# Altium PCB ARM_DIL_Platine.PcbDoc
Units mm, origin at the board's own origin, x right, y up, seen from the top; angles counter-clockwise.
Board outline 99.06 x 33.53 mm, 2 copper layers (Top Layer, Bottom Layer); 45 components, 67 nets, 219 pads, 28 vias.
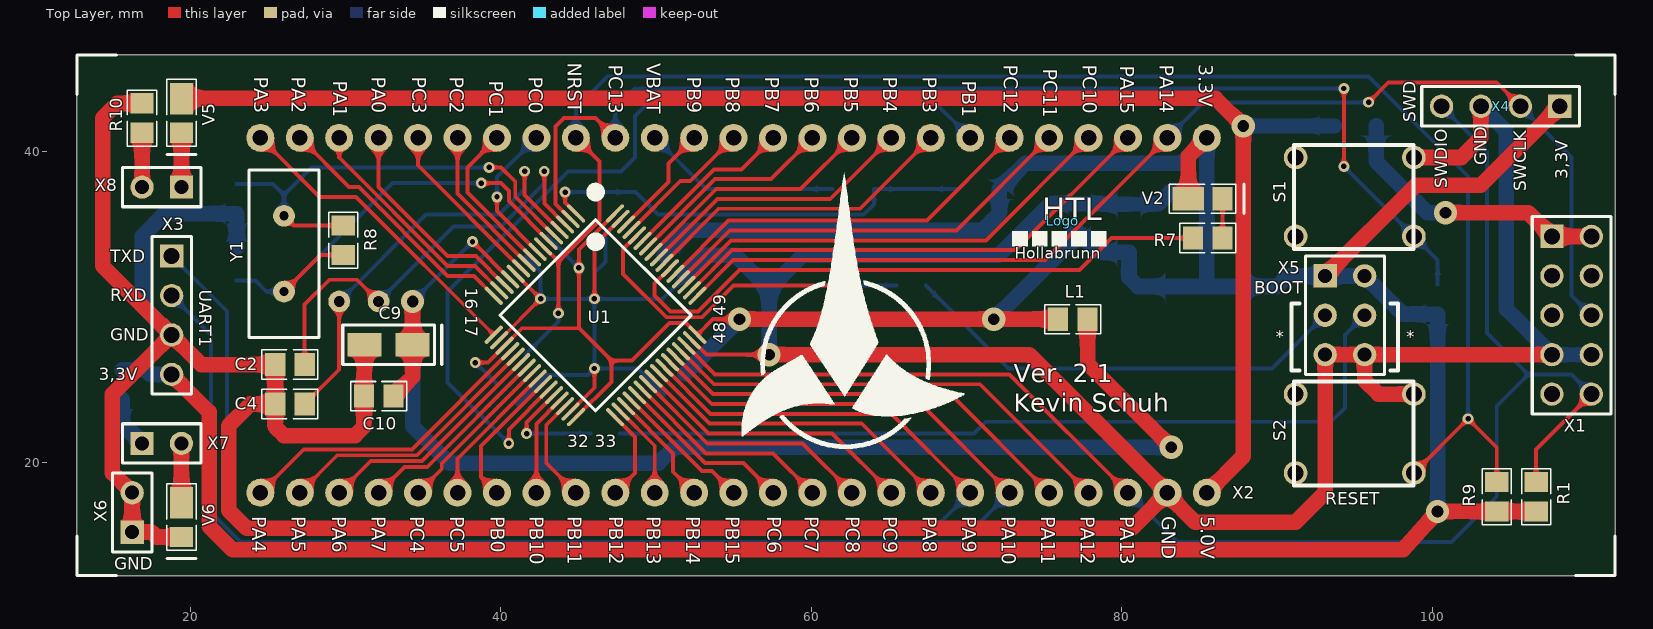
[diagram p0: Top Layer view]
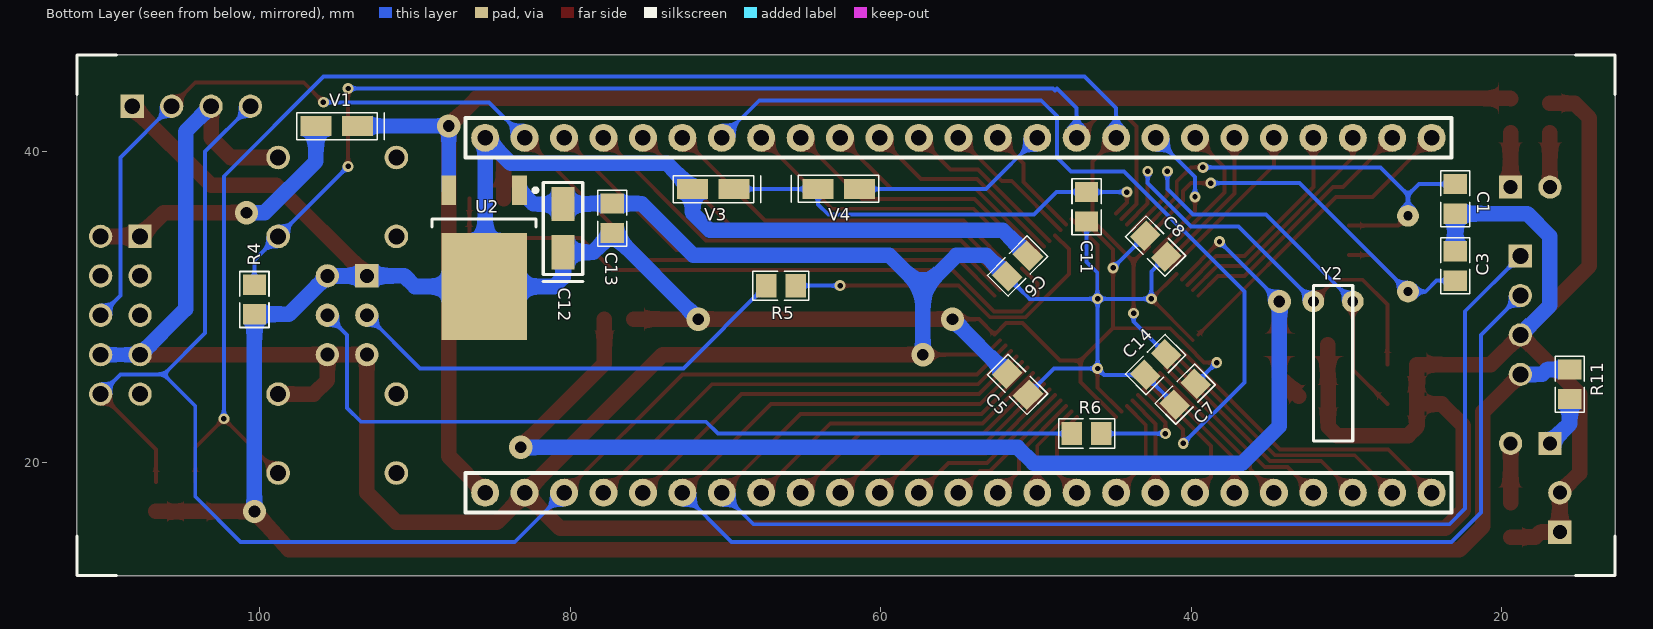
[diagram p1: Bottom Layer view, seen from below]

## Layer stack, top to bottom
Top Solder: solder mask 0.0102, Solder Resist, Dk 3.5
Top Layer: signal copper 0.0356
Dielectric 1: dielectric 0.32, FR-4, Dk 4.8
Bottom Layer: signal copper 0.0356
Bottom Solder: solder mask 0.0102, Solder Resist, Dk 3.5

## Board outline
12.7,46.228 111.76,46.228 111.76,12.7 12.7,12.7

## Design rules (kind name [scope] priority, off if disabled: settings)
Clearance [All] p1: gap=0.125
DiffPairsRouting [All] p1: maxlimit=10 minlimit=0.125 mostfreqgap=0.15 toplayer_minwidth=0.381 toplayer_maxwidth=0.381 toplayer_prefwidth=0.381 bottomlayer_minwidth=0.381 bottomlayer_maxwidth=0.381 bottomlayer_prefwidth=0.381 maxuncoupledlength=12.7
FabricationTestPointUsage FabricationTestPointUsage_1 [All] p1: valid=0 allowmultiple=FALSE
FabricationTestpoint FabricationTestpoint_1 [All] p1: side=3 testpointundercomponent=TRUE minsize=1.016 maxsize=2.54 preferedsize=1.524 minholesize=0 maxholesize=1.016 preferedholesize=0.813 testpointgrid=0.025 allowsidetop=TRUE allowsidebottom=TRUE usegrid=TRUE gridtolerance=0
HoleSize [All] p1: absolutevalues=TRUE maxlimit=6 minlimit=0.2 maxpercent=80.000 minpercent=20.000
HoleSize FabricationTestpoint [All] p2 off: absolutevalues=TRUE maxlimit=2.54 minlimit=0.025 maxpercent=80.000 minpercent=20.000
HoleSize FabricationTestPointUsage [All] p3 off: absolutevalues=TRUE maxlimit=2.54 minlimit=0.025 maxpercent=80.000 minpercent=20.000
MinimumSolderMaskSliver [All] p1: minsoldermaskwidth=0.249
PlaneClearance [All] p1: clearance=0.5
PlaneConnect [All] p1: planeconnectstyle=Relief reliefexpansion=0.4 reliefentries=4 reliefconductorwidth=0.15 reliefairgap=0.15
PolygonConnect [All] p1: connectstyle=Relief reliefconductorwidth=0.15 reliefentries=4 polygonreliefangle="90 Angle" airgapwidth=0.254
RoutingCorners [All] p1: cornerstyle=45-Degree minsetback=1.25 maxsetback=1.25
RoutingVias [All] p1: holewidth=0.3 width=0.6 viastyle="Through Hole" minholewidth=0.2 minwidth=0.45 maxholewidth=0.45 maxwidth=0.75
SilkToSilkClearance [All] p1: silktosilkclearance=0.16
SilkToSolderMaskClearance [IsPad] p1: minsilkscreentomaskgap=0 clearancetoexposedcopper=TRUE
SolderMaskExpansion [All] p1: expansion=0.075
UnpouredPolygon [All] p1: allowunpoured=FALSE
Width GND [InNet('GND')] p1: maxlimit=1.5 minlimit=0.254 preferedwidth=1
Width VCC [(InNet('+3.3V') AND InNet('+5V'))] p2: maxlimit=1.5 minlimit=0.254 preferedwidth=1
Width [All] p3: maxlimit=10 minlimit=0.254 preferedwidth=0.254
19 further rules are at their usual default settings.

## Components (designator, comment, footprint, x,y, rotation, side; value= is the part's Value field where it differs from the comment)
C1 "Cap" 0805_CAP 22.987,36.957 r90 bottom
C2 "Cap" 0805_CAP 26.416,26.289 r0 top
C3 "Cap" 0805_CAP 22.987,32.639 r90 bottom
C4 "Cap" 0805_CAP 26.416,23.749 r180 top
C5 "Cap" 0805_CAP 51.181,25.019 r45 bottom
C6 "Cap" 0805_CAP 51.181,32.639 r135 bottom
C7 "Cap" 0805_CAP 40.386,24.384 r135 bottom
C8 "Cap" 0805_CAP 42.291,33.909 r45 bottom
C9 "Cap Pol" 1411_Cap_Pol 32.766,27.559 r180 top
C10 "Cap" 0805_CAP 32.131,24.257 r0 top
C11 "Cap" 0805_CAP 46.736,36.449 r90 bottom
C12 "Cap Pol" 1411_Cap_Pol 80.457,35.07 r90 bottom
C13 "Cap" 0805_CAP 77.282,35.705 r270 bottom
C14 "Cap" 0805_CAP 42.291,26.289 r135 bottom
L1 "ferrite bead" 0805_ferrit 76.835,29.21 r180 top
Logo "HTL Hollabrunn" HTL_Logo 76.2,35.56 r0 top
R1 "Res" 0805_Res 106.68,17.78 r270 top
R4 "Res" 0805_Res 100.33,30.48 r270 bottom
R5 "Res" 0805_Res 66.421,31.369 r180 bottom
R6 "Res" 0805_Res 46.736,21.844 r0 bottom
R7 "Res" 0805_Res 85.537,34.435 r180 top
R8 "Res" 0805_Res 29.845,34.29 r90 top
R9 "Res" 0805_Res 104.14,17.78 r270 top
R10 "Res" 0805_Res 16.891,42.164 r270 top
R11 "Res" 0805_Res 15.621,25.019 r270 bottom
S1 "SW_SPST" Printtaster 91.186,39.624 r270 top locked
S2 "SW_SPST" Printtaster 91.186,24.384 r270 top locked
U1 "STM32F107RBT6" STM32F103RBT6 46.101,29.464 r315 top locked
U2 "LMS8117ADT_3.3" TD03B_N_Low_Dropout_Regulator 85.537,33.165 r270 bottom locked
V1 "D Schottky" BAT254_Schottky 94.488,40.894 r180 bottom
V2 "LED" 0805_LED 85.537,36.975 r0 top locked
V3 "D Schottky" BAT254_Schottky 70.231,36.83 r180 bottom
V4 "D Schottky" BAT254_Schottky 63.246,38.354 r0 bottom
V5 "LED" 0805_LED 19.431,42.164 r270 top
V6 "LED" 0805_LED 19.431,16.129 r270 top
X1 "ST-Link" HDR2X5_STLink 107.696,34.544 r270 top
X2 "DIL Adapter" DIL_Adapter_V03 24.511,40.894 r0 top locked
X3 "UART_1" HDR1X4_UART 18.796,33.274 r270 top
X4 "SWD" HDR1X4_SWD 108.204,42.926 r180 top
X5 "Header 3x2" HDR2X3 93.091,32.004 r270 top locked
X6 "GND" HDR1X2 16.256,15.494 r90 top
X7 "" HDR1X2 16.891,21.209 r0 top
X8 "" HDR1X2 19.431,37.719 r180 top
Y1 "25MHz" Schwingquarz_8MHz_TOP 26.035,30.988 r90 top
Y2 "32kHz" Schwingquarz_32k 29.591,30.353 r0 bottom

## Footprints (in the part's own frame and the unit in brackets; to place one, negate y for a bottom-side part, rotate by r counter-clockwise, add the part's x,y. Pads: shape width x height; smd on the part's side, far side on the other; paste and mask are expansions set on the pad)
0805_CAP [mm]
  rect 1.3x1.5 smd: 1(-0.95,0) 2(0.95,0)
  silkscreen extent -1.8,-0.94 1.8,0.94
0805_ferrit [mm]
  rect 1.3x1.5 smd: 1(-0.95,0) 2(0.95,0)
  silkscreen extent -1.8,-0.94 1.8,0.94
0805_LED [mm]
  rect 2.035x1.5 smd: 1(-1.255,0)
  rect 1.3x1.5 smd: 2(0.95,0)
  silkscreen extent -2.49,-0.94 2.34,0.94
0805_Res [mm]
  rect 1.3x1.5 smd: 1(-0.95,0) 2(0.95,0)
  silkscreen extent -1.8,-0.94 1.8,0.94
1411_Cap_Pol [mm]
  rect 2.2x1.5 smd: 1(-1.55,0) 2(1.55,0)
  silkscreen extent -3.43,-1.27 2.95,1.27
BAT254_Schottky [mm]
  rect 2x1.3 smd: 1(-1.88,0.762) 2(0.787,0.762)
  silkscreen extent -3.12,-0.13 2.51,1.63
DIL_Adapter_V03 [mm] "DIL_Adapter"
  round 1.8 hole 1: 1(0,-22.86) 2(2.54,-22.86) 3(5.08,-22.86) 4(7.62,-22.86) 5(10.16,-22.86) 6(12.7,-22.86) 7(15.24,-22.86) 8(17.78,-22.86) 9(20.32,-22.86) 10(22.86,-22.86) 11(25.4,-22.86) 12(27.94,-22.86) 13(30.48,-22.86) 14(33.02,-22.86) 15(35.56,-22.86) 16(38.1,-22.86) 17(40.64,-22.86) 18(43.18,-22.86) 19(45.72,-22.86) 20(48.26,-22.86) 21(50.8,-22.86) 22(53.34,-22.86) 23(55.88,-22.86) 24(58.42,-22.86) 25(60.96,-22.86) 26(60.96,0) 27(58.42,0) 28(55.88,0) 29(53.34,0) 30(50.8,0) 31(48.26,0) 32(45.72,0) 33(43.18,0) 34(40.64,0) 35(38.1,0) 36(35.56,0) 37(33.02,0) 38(30.48,0) 39(27.94,0) 40(25.4,0) 41(22.86,0) 42(20.32,0) 43(17.78,0) 44(15.24,0) 45(12.7,0) 46(10.16,0) 47(7.62,0) 48(5.08,0) 49(2.54,0) 50(0,0)
HDR1X2 [mm]
  rect 1.5x1.5 hole 0.9: 1(0,0)
  round 1.5 hole 0.9: 2(2.54,0)
  silkscreen extent -1.27,-1.27 3.81,1.27
HDR1X4_SWD [mm]
  rect 1.5x1.5 hole 1.016: 1(0,0)
  round 1.5 hole 1.016: 2(2.54,0) 3(5.08,0) 4(7.62,0)
  silkscreen extent -1.27,-1.27 8.89,1.27
HDR1X4_UART [mm]
  rect 1.5x1.5 hole 1.016: 1(0,0)
  round 1.5 hole 1.016: 2(2.54,0) 3(5.08,0) 4(7.62,0)
  silkscreen extent -1.27,-1.27 8.89,1.27
HDR2X3 [mm] "Connector; Header; 3x2 Position"
  rect 1.5x1.5 hole 0.9: 1(0,0)
  round 1.5 hole 0.9: 2(2.54,0) 3(5.08,0) 4(0,2.54) 5(2.54,2.54) 6(5.08,2.54)
  silkscreen extent -1.27,-1.27 6.35,3.81
HDR2X5_STLink [mm]
  rect 1.5x1.5 hole 1.016: 1(0,0)
  round 1.5 hole 1.016: 2(0,2.54) 3(2.54,0) 4(2.54,2.54) 5(5.08,0) 6(5.08,2.54) 7(7.62,0) 8(7.62,2.54) 9(10.16,0) 10(10.16,2.54)
  silkscreen extent -1.27,-1.27 11.43,3.81
HTL_Logo [mm]
  silkscreen extent -3.28,-1.68 2.82,-0.66
Printtaster [mil]
  round 60 hole 40: 1(0,300) 2(200,300) 3(0,0) 4(200,0)
  silkscreen extent -32,-4 232,299
Schwingquarz_8MHz_TOP [mm]
  round 1.4 hole 0.6: 1(0,0) 2(4.88,0)
  silkscreen extent -2.95,-2.25 7.82,2.25
Schwingquarz_32k [mm]
  round 1.4 hole 0.7: 1(0,0) 2(2.54,0)
  silkscreen extent 0,-1.02 2.54,9
STM32F103RBT6 [mm] "Processor"
  oval 1.55x0.25 smd mask+0: 1(-5.525,3.75) 2(-5.525,3.25) 3(-5.525,2.75) 4(-5.525,2.25) 5(-5.525,1.75) 6(-5.525,1.25) 7(-5.525,0.75) 8(-5.525,0.25) 9(-5.525,-0.25) 10(-5.525,-0.75) 11(-5.525,-1.25) 12(-5.525,-1.75) 13(-5.525,-2.25) 14(-5.525,-2.75) 15(-5.525,-3.25) 16(-5.525,-3.75) 33(5.525,-3.75) 34(5.525,-3.25) 35(5.525,-2.75) 36(5.525,-2.25) 37(5.525,-1.75) 38(5.525,-1.25) 39(5.525,-0.75) 40(5.525,-0.25) 41(5.525,0.25) 42(5.525,0.75) 43(5.525,1.25) 44(5.525,1.75) 45(5.525,2.25) 46(5.525,2.75) 47(5.525,3.25) 48(5.525,3.75)
  oval 0.25x1.55 smd mask+0: 17(-3.75,-5.525) 18(-3.25,-5.525) 19(-2.75,-5.525) 20(-2.25,-5.525) 21(-1.75,-5.525) 22(-1.25,-5.525) 23(-0.75,-5.525) 24(-0.25,-5.525) 25(0.25,-5.525) 26(0.75,-5.525) 27(1.25,-5.525) 28(1.75,-5.525) 29(2.25,-5.525) 30(2.75,-5.525) 31(3.25,-5.525) 32(3.75,-5.525) 49(3.75,5.525) 50(3.25,5.525) 51(2.75,5.525) 52(2.25,5.525) 53(1.75,5.525) 54(1.25,5.525) 55(0.75,5.525) 56(0.25,5.525) 57(-0.25,5.525) 58(-0.75,5.525) 59(-1.25,5.525) 60(-1.75,5.525) 61(-2.25,5.525) 62(-2.75,5.525) 63(-3.25,5.525)
  oval 0.25x1.55 smd mask-0.25: 64(-3.75,5.525)
  silkscreen extent -5.91,-4.35 4.35,5.91, body extent -5,-5 5,5, height 1.6
TD03B_N_Low_Dropout_Regulator [mm]
  rect 1.9x0.95 smd: 1(-4.35,2.28) 3(-4.35,-2.28)
  rect 6.9x5.5 smd: 4(1.85,0)
  silkscreen extent -4.47,-3.35 -2,3.43, body extent -2.5,-3.35 3.7,3.35, height 2.38

## Part data
C1 C2 C3 C4 C5 C6 C7 C8 C10 C11 C13 C14: "Capacitor"
C9 C12: library part Cap_Pol, "Polarized Capacitor (Radial)"
L1: library part Inductor, "Inductor"
Logo: library part "HTL Logo"
R1 R4 R5 R6 R7 R8 R9 R10 R11: "Resistor"
S1 S2: "Single-Pole, Single-Throw Switch"
U1: library part STM32F103RBT6, "STM32 ARM-based 32-bit MCU with 128 Kbytes Flash, 64-pin LQFP, Industrial Temperature"
U2: "1A Low-Dropout Linear Regulator"
V1 V3 V4: library part D_Schottky, "Schottky Diode"
V2 V5 V6: "Typical RED, GREEN, YELLOW, AMBER GaAs LED"
X1: library part STLink, "Flat Cable Connector (IDC), Low-Profile Male Header, Straight Solder Pin, 20 Contacts, Performance Level 2"
X2: library part DIL_Adapter_V03, "DIL Adapter 50 Pin"
X3 X4: "Header, 4-Pin"
X5: "Header, 3-Pin, Dual row"
X6 X7 X8: library part Header_2, "Header, 2-Pin"
Y1 Y2: library part 3SMXA, "Surface Mount Quartz Crystal"

## Via types
v1: diameter 0.7, hole 0.35, Top Layer to Bottom Layer, tented both sides, 20 vias
v2: diameter 1.5, hole 0.75, Top Layer to Bottom Layer, tented both sides, 8 vias

## Nets (pads, with @x,y where several pads share a name; then routed paths per layer and width w, separated by ;. In a path a pad name is that pad's centre, name@x,y a point inside that pad or via, vN(x,y) a via of type N, cw(c..) or ccw(c..) an arc to the next point about the centre after c; other vN are vias at no path point)
+3.3V: C5.2 C6.2 C7.2 C8.2 C12.1 C13.2 L1.2 R1.2 R4.2 R9.2 R11.1 U1.19 U1.32 U1.48 U1.64 U2.4 V2.1 V3.1 X2.26 X3.4 X4.1 X5.1 X5.4 | length 284.9
  Top Layer w0.254: v1(38.354,26.416) 39.164,26.416 U1.19 41.376,28.628 45.032,28.628 v1(45.032,32.512) 45.032,33.698 U1.64 ; U1.32 47.117,25.177 47.117,26.543 ; 45.085,28.575 47.117,26.543 ; v2(55.372,29.21) 53.661,29.21 U1.48 51.912,28.956 50.874,28.956 48.461,26.543 47.117,26.543
  Top Layer w1: X3.4 21.209,23.241 21.209,15.875 22.733,14.351 98.107,14.351 v2(100.33,16.828) 100.332,16.83 R9.2 R1.2 ; v2(55.372,29.21) v2(71.755,29.21) L1.2 ; V2.1 84.282,39.705 X2.26 ; X5.1 98.933,37.846 103.124,37.846 X4.1
  Bottom Layer w0.254: v1(38.354,26.416) C7.2 ; C8.2 v1(45.032,32.512)
  Bottom Layer w1: R11.1 17.084,25.969 17.399,25.654 X3.4 ; C6.2 52.123,34.925 70.993,34.925 72.111,36.043 V3.1 73.762,39.243 83.82,39.243 X2.26 85.471,31.381 U2.4 ; C5.2 v2(55.372,29.21) ; v2(71.755,29.21) 71.755,29.228 C13.2 78.517,33.52 C12.1 80.457,31.895 81.037,31.315 U2.4 ; v2(100.33,16.828) R4.2 98.105,29.53 X5.4 X5.1 90.678,32.004 89.989,31.315 U2.4
+5V: U2.3 V1.2 V5.1 X2.25 | length 103.7
  Top Layer w1: V5.1 19.446,43.434 86.039,43.434 v2(87.817,41.656) 87.817,20.38 X2.25
  Bottom Layer w0.95: U2.3 v2(87.817,41.656) V1.2
GND: C1.1 C2.1 C3.2 C4.2 C5.1 C6.1 C7.1 C8.1 C9.2 C10.1 C11.1 C12.2 C13.1 C14.1 R10.1 S1.1 S2.1 U1.12 U1.18 U1.31 U1.47 U1.63 U2.1 V6.2 X1.7 X1.8 X2.24 X3.3 X4.3 X5.3 X5.6 X6.1 X6.2 | length 337.7
  Top Layer w0.254: U1.18 v1(42.565,30.525) U1.12 ; U1.31 46.03,24.796 v1(46.03,26.035) ; v1(46.03,30.525) 46.03,33.989 U1.63 ; U1.47 53.237,26.924 v2(57.277,26.924)
  Top Layer w1: R10.1 15.301,43.114 14.351,42.164 14.351,32.639 X3.3 ; V6.2 17.841,15.179 17.526,15.494 X6.1 X6.2 14.986,19.304 14.986,24.384 X3.3 ; C9.2 31.216,25.689 31.181,25.654 C10.1 31.181,22.291 30.607,21.717 26.035,21.717 25.466,22.286 C4.2 ; v2(57.277,26.924) 74.041,26.924 X2.24 ; S2.1 96.52,24.384 95.631,25.273 X5.6 ; S1.1 101.854,39.624 103.124,40.894 X4.3 ; X1.7@107.95,26.924 X5.6 ; X3.3 20.701,26.289 C2.1 C4.2 ; C4.2 23.876,23.749 22.479,22.352 22.479,16.891 23.622,15.748 80.645,15.748 X2.24 ; X2.24 82.931,17.917 84.719,16.129 91.186,16.129 93.091,18.034 X5.3 X5.6
  Bottom Layer w0.254: C7.1 C14.1 45.612,25.617 v1(46.03,26.035) ; C8.1 42.565,32.291 v1(42.565,30.525) v1(46.03,30.525) ; C11.1@46.736,34.864 46.736,32.893 46.048,32.205 v1@46.048,30.525 ; C5.1 48.821,26.035 v1(46.03,26.035) ; C6.1 50.41,30.525 v1@46.048,30.525 ; v1(46.03,26.035) v1(46.03,30.525) ; v1(46.03,30.525) v1@46.048,30.525
  Bottom Layer w0.95: C12.2 82.362,36.62 U2.1 ; X1.7 X1.8
  Bottom Layer w1: X3.3 16.891,30.099 16.891,34.544 18.354,36.007 C1.1 C3.2@22.987,33.843 ; C6.1 53.203,33.318 55.118,33.318 57.277,31.159 ; v2(57.277,26.924) 57.277,31.159 ; C12.2 78.775,36.62 78.74,36.655 C13.1 75.39,36.655 72.053,33.318 59.436,33.318 57.277,31.159 ; X4.3 104.763,41.287 104.763,29.857 X1.7
NetC1_2: C1.2 R8.2 U1.5 Y1.2 | length 29.3
  Top Layer w0.254: Y1.2 26.663,35.24 R8.2 ; v1(39.243,38.989) 40.005,38.989 40.927,38.067 40.927,37.113 U1.5
  Bottom Layer w0.254: C1.2 25.339,37.907 26.035,37.211 ; Y1.2 26.035,37.211 ; v1(39.243,38.989) 27.813,38.989 26.035,37.211
NetC2_2: C2.2 U1.3 Y2.2 | length 28.4
  Top Layer w0.254: C2.2 27.366,30.16 28.956,31.75 30.734,31.75 Y2.2 ; v1(42.799,38.735) 42.799,36.655 U1.3
  Bottom Layer w0.254: Y2.2 36.957,35.179 39.998,35.179 42.799,37.98 v1(42.799,38.735)
NetC3_1: C3.1 R8.1 U1.6 Y1.1 | length 30
  Top Layer w0.254: Y1.1 28.387,33.34 R8.1 ; v1(38.735,37.973) 40.005,37.973 40.513,37.465 40.513,36.82 U1.6
  Bottom Layer w0.254: C3.1 24.191,31.689 24.892,30.988 Y1.1 33.02,37.973 v1(38.735,37.973)
NetC4_1: C4.1 U1.4 Y2.1 | length 28.3
  Top Layer w0.254: C4.1 29.591,25.974 Y2.1 ; v1(41.529,38.735) 41.529,37.218 U1.4
  Bottom Layer w0.254: Y2.1 35.179,35.941 39.878,35.941 41.529,37.592 v1(41.529,38.735)
NetC9_1: C9.1 C10.2 L1.1 U1.13 | length 84.3
  Top Layer w0.254: v1(38.176,34.207) U1.13
  Top Layer w1: C10.2 34.316,25.492 C9.1 v2(34.316,30.353) ; L1.1 77.785,26.355 v2(83.185,20.955)
  Bottom Layer w0.254: v2(34.316,30.353) 34.322,30.353 v1(38.176,34.207)
  Bottom Layer w1: v2(34.316,30.353) 34.316,22.326 36.703,19.939 50.165,19.939 51.181,20.955 v2(83.185,20.955)
NetC11_2: C11.2 U1.1 V3.2 V4.2 | length 28.8
  Top Layer w0.254: v1(44.135,37.399) 44.135,36.733 U1.1
  Bottom Layer w0.254: v1(44.135,37.399) C11.2 48.659,37.399 50.117,35.941 63.373,35.941 64.033,36.601 V4.2 V3.2
NetC14_2: C14.2 R9.1 S2.2 U1.7 X2.42 | length 106.2
  Top Layer w0.254: U1.7 43.71,32.915 ; v1(43.71,29.591) 43.71,32.915 ; X2.42 46.355,39.37 46.355,35.56 43.71,32.915 ; S2.2 v1(102.298,22.796) 104.14,20.955 R9.1
  Bottom Layer w0.254: C14.2 43.71,29.052 v1(43.71,29.591) ; X2.42 44.831,42.799 46.863,44.831 95.885,44.831 102.298,38.417 v1(102.298,22.796)
NetR1_1: R1.1 U1.46 X1.10 X2.23 X4.4 | length 98.7
  Top Layer w0.254: U1.46 53.8,25.654 72.771,25.654 X2.23 ; R1.1 106.68,20.828 X1.10
  Bottom Layer w0.254: X2.23 83.566,14.859 101.219,14.859 104.14,17.78 104.14,23.622 106.172,25.654 ; X4.4 103.505,40.005 103.505,28.321 106.172,25.654 ; X1.10 108.966,25.654 106.172,25.654
NetR4_1: R4.1 S1.2 U1.2 X2.41 | length 75.5
  Top Layer w0.254: U1.2 43.533,36.628 43.533,41.628 44.069,42.164 46.101,42.164 X2.41 ; v1(94.297,39.052) v1(94.297,44.069)
  Bottom Layer w0.254: X2.41 47.371,42.799 48.641,44.069 48.768,43.942 48.895,44.069 v1(94.297,44.069) ; v1(94.297,39.052) S1.2 100.33,33.02 R4.1
NetR5_1: R5.1 X5.2 | length 29.3
  Bottom Layer w0.254: R5.1 72.705,26.035 89.662,26.035 X5.2
NetR5_2: R5.2 U1.60 | length 22.4
  Top Layer w0.254: U1.60 47.879,33.717 47.879,32.131 50.675,29.335 52.959,29.335 54.993,31.369 v1(62.611,31.369)
  Bottom Layer w0.254: v1(62.611,31.369) R5.2
NetR6_1: R6.1 U1.28 | length 7.3
  Top Layer w0.254: v1(41.656,21.844) 41.656,22.544 U1.28
  Bottom Layer w0.254: v1(41.656,21.844) R6.1
NetR6_2: R6.2 X5.5 | length 53.9
  Bottom Layer w0.254: R6.2 70.485,21.844 71.247,22.606 93.472,22.606 94.361,23.495 94.361,28.194 X5.5
NetR7_1: R7.1 V2.2 | length 2.5
  Top Layer w0.254: R7.1 V2.2
NetR7_2: R7.2 U1.54 | length 39.2
  Top Layer w0.254: U1.54 49.906,31.501 49.906,30.739 50.927,29.718 52.705,29.718 55.372,32.385 77.282,32.385 79.332,34.435 R7.2
NetR10_2: R10.2 X8.2 | length 3.5
  Top Layer w1: X8.2 R10.2
NetR11_2: R11.2 X7.1 | length 3.4
  Bottom Layer w1: R11.2 15.621,22.479 X7.1
NetU1_8: U1.8 X2.43 | length 9.5
  Top Layer w0.254: v1(39.751,37.084) 39.751,36.168 U1.8
  Bottom Layer w0.254: v1(39.751,37.084) 39.751,38.354 X2.43
NetU1_9: U1.9 X2.44 | length 10.2
  Top Layer w0.254: X2.44 37.846,38.989 37.846,37.365 U1.9
NetU1_10: U1.10 X2.45 | length 9.9
  Top Layer w0.254: X2.45 37.211,37.293 U1.10
NetU1_11: U1.11 X2.46 | length 11.2
  Top Layer w0.254: X2.46 34.671,39.126 U1.11
NetU1_14: U1.14 X2.47 | length 13.9
  Top Layer w0.254: X2.47 32.131,37.719 36.576,33.274 38.402,33.274 U1.14
NetU1_15: U1.15 X2.48 | length 15.1
  Top Layer w0.254: X2.48 29.591,39.624 36.576,32.639 38.33,32.639 U1.15
NetU1_16: U1.16 X2.49 | length 16.7
  Top Layer w0.254: X2.49 30.226,37.719 30.861,37.719 36.576,32.004 38.258,32.004 U1.16
NetU1_17: U1.17 X2.50 | length 20.3
  Top Layer w0.254: X2.50 28.321,37.084 30.667,37.084 U1.17
NetU1_20: U1.20 X2.1 | length 19.9
  Top Layer w0.254: X2.1 27.305,20.828 34.283,20.828 U1.20
NetU1_21: U1.21 X2.2 | length 17.5
  Top Layer w0.254: X2.2 29.464,20.447 34.609,20.447 U1.21
NetU1_22: U1.22 X2.3 | length 15.2
  Top Layer w0.254: X2.3 31.623,20.066 34.935,20.066 U1.22
NetU1_23: U1.23 X2.4 | length 12.9
  Top Layer w0.254: X2.4 33.782,19.685 35.261,19.685 U1.23
NetU1_24: U1.24 X2.5 | length 10.7
  Top Layer w0.254: X2.5 36.195,19.558 36.195,19.912 U1.24
NetU1_25: U1.25 X2.6 | length 9.5
  Top Layer w0.254: X2.6 37.211,20.22 U1.25
NetU1_26: U1.26 X2.7 | length 9.1
  Top Layer w0.254: X2.7 38.735,19.05 38.735,21.037 U1.26
NetU1_27: U1.27 X2.32 | length 57.3
  Top Layer w0.254: v1(40.513,21.209) 40.513,22.108 U1.27
  Bottom Layer w0.254: v1(40.513,21.209) 36.576,25.146 36.576,30.988 44.323,38.735 47.752,38.735 48.641,39.624 48.641,42.291 49.657,43.307 67.818,43.307 X2.32
NetU1_29: U1.29 X2.8 | length 6.6
  Top Layer w0.254: X2.8 42.291,22.472 U1.29
NetU1_30: U1.30 X2.9 | length 6.9
  Top Layer w0.254: U1.30 42.926,22.4 42.926,19.939 X2.9
NetU1_33: U1.33 X2.10 | length 5.9
  Top Layer w0.254: U1.33 48.641,21.621 48.641,19.304 X2.10
NetU1_34: U1.34 X2.11 | length 6.1
  Top Layer w0.254: U1.34 49.911,21.058 X2.11
NetU1_35: U1.35 X2.12 | length 7.4
  Top Layer w0.254: U1.35 51.102,20.574 51.102,19.383 X2.12
NetU1_36: U1.36 X2.13 | length 9
  Top Layer w0.254: U1.36 52.952,19.431 53.594,19.431 X2.13
NetU1_37: U1.37 X2.14 | length 11.4
  Top Layer w0.254: U1.37 53.151,19.939 55.626,19.939 X2.14
NetU1_38: U1.38 X2.15 | length 13.7
  Top Layer w0.254: U1.38 53.223,20.574 57.531,20.574 X2.15
NetU1_39: U1.39 X2.16 | length 16
  Top Layer w0.254: U1.39 53.295,21.209 59.436,21.209 X2.16
NetU1_40: U1.40 X2.17 | length 18.4
  Top Layer w0.254: U1.40 53.367,21.844 61.341,21.844 X2.17
NetU1_41: U1.41 X2.18 | length 20.7
  Top Layer w0.254: U1.41 53.44,22.479 63.246,22.479 X2.18
NetU1_42: U1.42 X2.19 X3.1 | length 89.9
  Top Layer w0.254: U1.42 53.512,23.114 65.151,23.114 X2.19
  Bottom Layer w0.254: X3.1 22.35,29.72 22.35,17.02 23.368,16.002 68.199,16.002 X2.19
NetU1_43: U1.43 X2.20 X3.2 | length 93.9
  Top Layer w0.254: U1.43 53.584,23.749 67.056,23.749 X2.20
  Bottom Layer w0.254: X3.2 21.336,28.194 21.336,16.764 23.241,14.859 69.596,14.859 X2.20
NetU1_44: U1.44 X2.21 | length 27.7
  Top Layer w0.254: U1.44 53.656,24.384 68.961,24.384 X2.21
NetU1_45: U1.45 X2.22 | length 30
  Top Layer w0.254: U1.45 53.728,25.019 70.866,25.019 X2.22
NetU1_49: U1.49 X1.6 X2.27 X4.2 | length 74.7
  Top Layer w0.254: U1.49 54.96,33.02 75.057,33.02 X2.27 ; v1(95.885,43.18) 97.155,44.45 104.14,44.45 X4.2
  Bottom Layer w0.254: X2.27 85.217,43.18 v1(95.885,43.18) ; X4.2 108.966,39.624 108.966,30.734 X1.6
NetU1_50: U1.50 X2.28 | length 32.2
  Top Layer w0.254: U1.50 54.888,33.655 73.152,33.655 X2.28
NetU1_51: U1.51 X2.29 | length 29.8
  Top Layer w0.254: U1.51 54.816,34.29 71.247,34.29 X2.29
NetU1_52: U1.52 X2.30 | length 27.5
  Top Layer w0.254: U1.52 54.744,34.925 69.342,34.925 X2.30
NetU1_53: U1.53 X2.31 | length 25.2
  Top Layer w0.254: U1.53 54.672,35.56 67.437,35.56 X2.31
NetU1_55: U1.55 X2.33 | length 20.5
  Top Layer w0.254: U1.55 54.02,36.322 63.119,36.322 X2.33
NetU1_56: U1.56 X2.34 | length 18.2
  Top Layer w0.254: U1.56 53.948,36.957 61.214,36.957 X2.34
NetU1_57: U1.57 X2.35 | length 15.8
  Top Layer w0.254: U1.57 53.875,37.592 59.309,37.592 X2.35
NetU1_58: U1.58 X2.36 | length 13.5
  Top Layer w0.254: U1.58 53.803,38.227 57.404,38.227 X2.36
NetU1_59: U1.59 X2.37 | length 11.2
  Top Layer w0.254: U1.59 53.731,38.862 55.499,38.862 X2.37
NetU1_61: U1.61 X2.38 | length 9
  Top Layer w0.254: U1.61 51.555,38.1 52.197,38.1 X2.38
NetU1_62: U1.62 X2.39 | length 7.4
  Top Layer w0.254: U1.62 50.8,38.052 50.8,39.243 X2.39
NetV1_1: V1.1 X1.1 X1.2 | length 18.4
  Top Layer w1: v2(100.838,36.068) 106.172,36.068 X1.1 X1.2@110.49,34.544
  Bottom Layer w1: V1.1 96.368,39.37 99.67,36.068 v2(100.838,36.068)
NetV4_1: V4.1 X2.40 | length 12.8
  Bottom Layer w0.254: X2.40 53.213,37.592 V4.1
NetV5_2: V5.2 X8.1 | length 3.5
  Top Layer w1: X8.1 V5.2
NetV6_1: V6.1 X7.2 | length 3.8
  Top Layer w1: V6.1 X7.2
pads on no net: S1.3 S1.4 S2.3 S2.4 X1.3 X1.4 X1.5 X1.9

## Silkscreen, mask and mechanical layers (free items; w line width, h text height)
Top Overlay:
  drawing of 1591 lines, arcs and shapes, not listed
  text "SWD" at 98.933,41.91 h0.8 r90
  text "16 17" at 37.719,31.242 h0.8 r270
  text "UART1" at 20.574,31.115 h0.8 r270
  text "BOOT" at 88.519,30.861 h0.8
  text "*" at 89.916,27.686 h0.8
  text "*" at 98.298,27.686 h0.8
  text "48 49" at 54.483,27.635 h0.8 r90
  text "Ver. 2.1" at 73.025,24.765 h2
  text "Kevin Schuh" at 73.025,22.86 h2
  text "32 33" at 44.272,20.955 h0.8
  text "RESET" at 93.091,17.272 h0.8
  text "GND" at 15.113,13.081 h0.8
Bottom Overlay:
  lines w0.2: 12.7,15.24 12.7,12.7 15.24,12.7 ; 12.7,43.688 12.7,46.228 15.24,46.228 ; 109.22,12.7 111.76,12.7 111.76,15.24 ; 109.22,46.228 111.76,46.228 111.76,43.688
Mechanical 1:
  lines w0.254: 12.7,46.228 12.7,12.7 111.76,12.7 ; 12.7,46.228 12.7,46.228 ; 12.7,46.228 111.76,46.228 ; 111.76,12.7 111.76,46.228 ; 111.76,12.7 111.76,12.7 ; 111.76,46.228 111.76,46.228
Mechanical 4:
  text "base material FR4" at 118.11,43.18 h1.52
  text "double-sided Cu-cald 1x35um" at 118.11,40.64 h1.52
  text "pcb-thickness 1.6mm" at 118.11,38.1 h1.52
  text "print +/- 0,05 mm" at 118.11,35.56 h1.52
  text "outline +/- 0,1 mm" at 118.11,33.02 h1.52
  text "key" at 118.11,25.4 h1.52
  text "all dimensions in mm" at 118.11,20.32 h1.52
Drill Drawing:
  text ".legend" at 118.11,22.86 h1.52

## Dimensions
12.7,46.228 to 12.7,12.7 on Mechanical 2
12.7,12.7 to 0,0 on Mechanical 2
12.7,12.7 to 0,0 on Mechanical 2
12.7,12.7 to 111.76,12.7 on Mechanical 2

## Text inside footprints (layer, text, board x,y; h text height)
Logo: Top Overlay "HTL" at 74.879,35.103 h2.5; Top Overlay "Hollabrunn" at 73.101,32.842 h1.25
X2: Top Overlay "PB1" at 69.723,44.577 h0.89 r270; Top Overlay "PB8" at 54.483,44.831 h0.89 r270; Top Overlay "PA1" at 29.21,44.577 h0.89 r270; Top Overlay "PA0" at 31.699,44.831 h0.89 r270; Top Overlay "PA3" at 24.13,44.831 h0.89 r270; Top Overlay "PA2" at 26.543,44.831 h0.89 r270; Top Overlay "3.3V" at 84.963,45.624 h0.89 r270; Top Overlay "PC0" at 41.783,44.831 h0.89 r270; Top Overlay "PC2" at 36.703,44.831 h0.89 r270; Top Overlay "PC1" at 39.243,44.577 h0.89 r270; Top Overlay "PC3" at 34.29,44.831 h0.89 r270; Top Overlay "PA14" at 82.423,45.593 h0.89 r270; Top Overlay "PA15" at 79.883,45.54 h0.89 r270; Top Overlay "PB3" at 67.183,44.831 h0.89 r270; Top Overlay "PB4" at 64.643,44.831 h0.89 r270; Top Overlay "PC13" at 46.939,45.593 h0.89 r270; Top Overlay "PC11" at 74.93,45.339 h0.89 r270; Top Overlay "PB9" at 52.019,44.831 h0.89 r270; Top Overlay "PB5" at 62.103,44.831 h0.89 r270; Top Overlay "PC10" at 77.47,45.593 h0.89 r270; Top Overlay "PC12" at 72.39,45.593 h0.89 r270; Top Overlay "PB7" at 57.023,44.831 h0.89 r270; Top Overlay "PB6" at 59.563,44.831 h0.89 r270; Top Overlay "5.0V" at 85.09,16.51 h0.89 r270; Top Overlay "VBAT" at 49.403,45.689 h0.89 r270; Top Overlay "NRST" at 44.323,45.72 h0.89 r270; Top Overlay "PC4" at 34.163,16.51 h0.89 r270; Top Overlay "GND" at 82.55,16.51 h0.89 r270; Top Overlay "PA5" at 26.543,16.51 h0.89 r270; Top Overlay "PA6" at 29.134,16.51 h0.89 r270; Top Overlay "PA7" at 31.699,16.51 h0.89 r270; Top Overlay "PA8" at 67.183,16.51 h0.89 r270; Top Overlay "PC5" at 36.754,16.51 h0.89 r270; Top Overlay "PC7" at 59.563,16.51 h0.89 r270; Top Overlay "PC8" at 62.23,16.51 h0.89 r270; Top Overlay "PC9" at 64.643,16.51 h0.89 r270; Top Overlay "PA13" at 79.883,16.51 h0.89 r270; Top Overlay "PB14" at 51.943,16.51 h0.89 r270; Top Overlay "PC6" at 57.15,16.51 h0.89 r270; Top Overlay "PB15" at 54.483,16.51 h0.89 r270; Top Overlay "PB12" at 46.99,16.51 h0.89 r270; Top Overlay "PA12" at 77.343,16.51 h0.89 r270; Top Overlay "PB11" at 44.323,16.51 h0.89 r270; Top Overlay "PA4" at 24.003,16.51 h0.89 r270; Top Overlay "PB10" at 41.859,16.51 h0.89 r270; Top Overlay "PA11" at 74.803,16.51 h0.89 r270; Top Overlay "PB0" at 39.345,16.51 h0.89 r270; Top Overlay "PA10" at 72.263,16.51 h0.89 r270; Top Overlay "PA9" at 69.723,16.51 h0.89 r270; Top Overlay "PB13" at 49.403,16.51 h0.89 r270
X3: Top Overlay "RXD" at 14.859,30.353 h0.8; Top Overlay "TXD" at 14.859,32.893 h0.8; Top Overlay "GND" at 14.859,27.813 h0.8; Top Overlay "3,3V" at 14.097,25.273 h0.8
X4: Top Overlay "3,3V" at 108.712,38.227 h0.8 r90; Top Overlay "SWCLK" at 106.045,37.465 h0.8 r90; Top Overlay "GND" at 103.505,39.116 h0.8 r90; Top Overlay "SWDIO" at 100.965,37.655 h0.8 r90